# EAGLE board incubator (EAGLE 6.5.0)
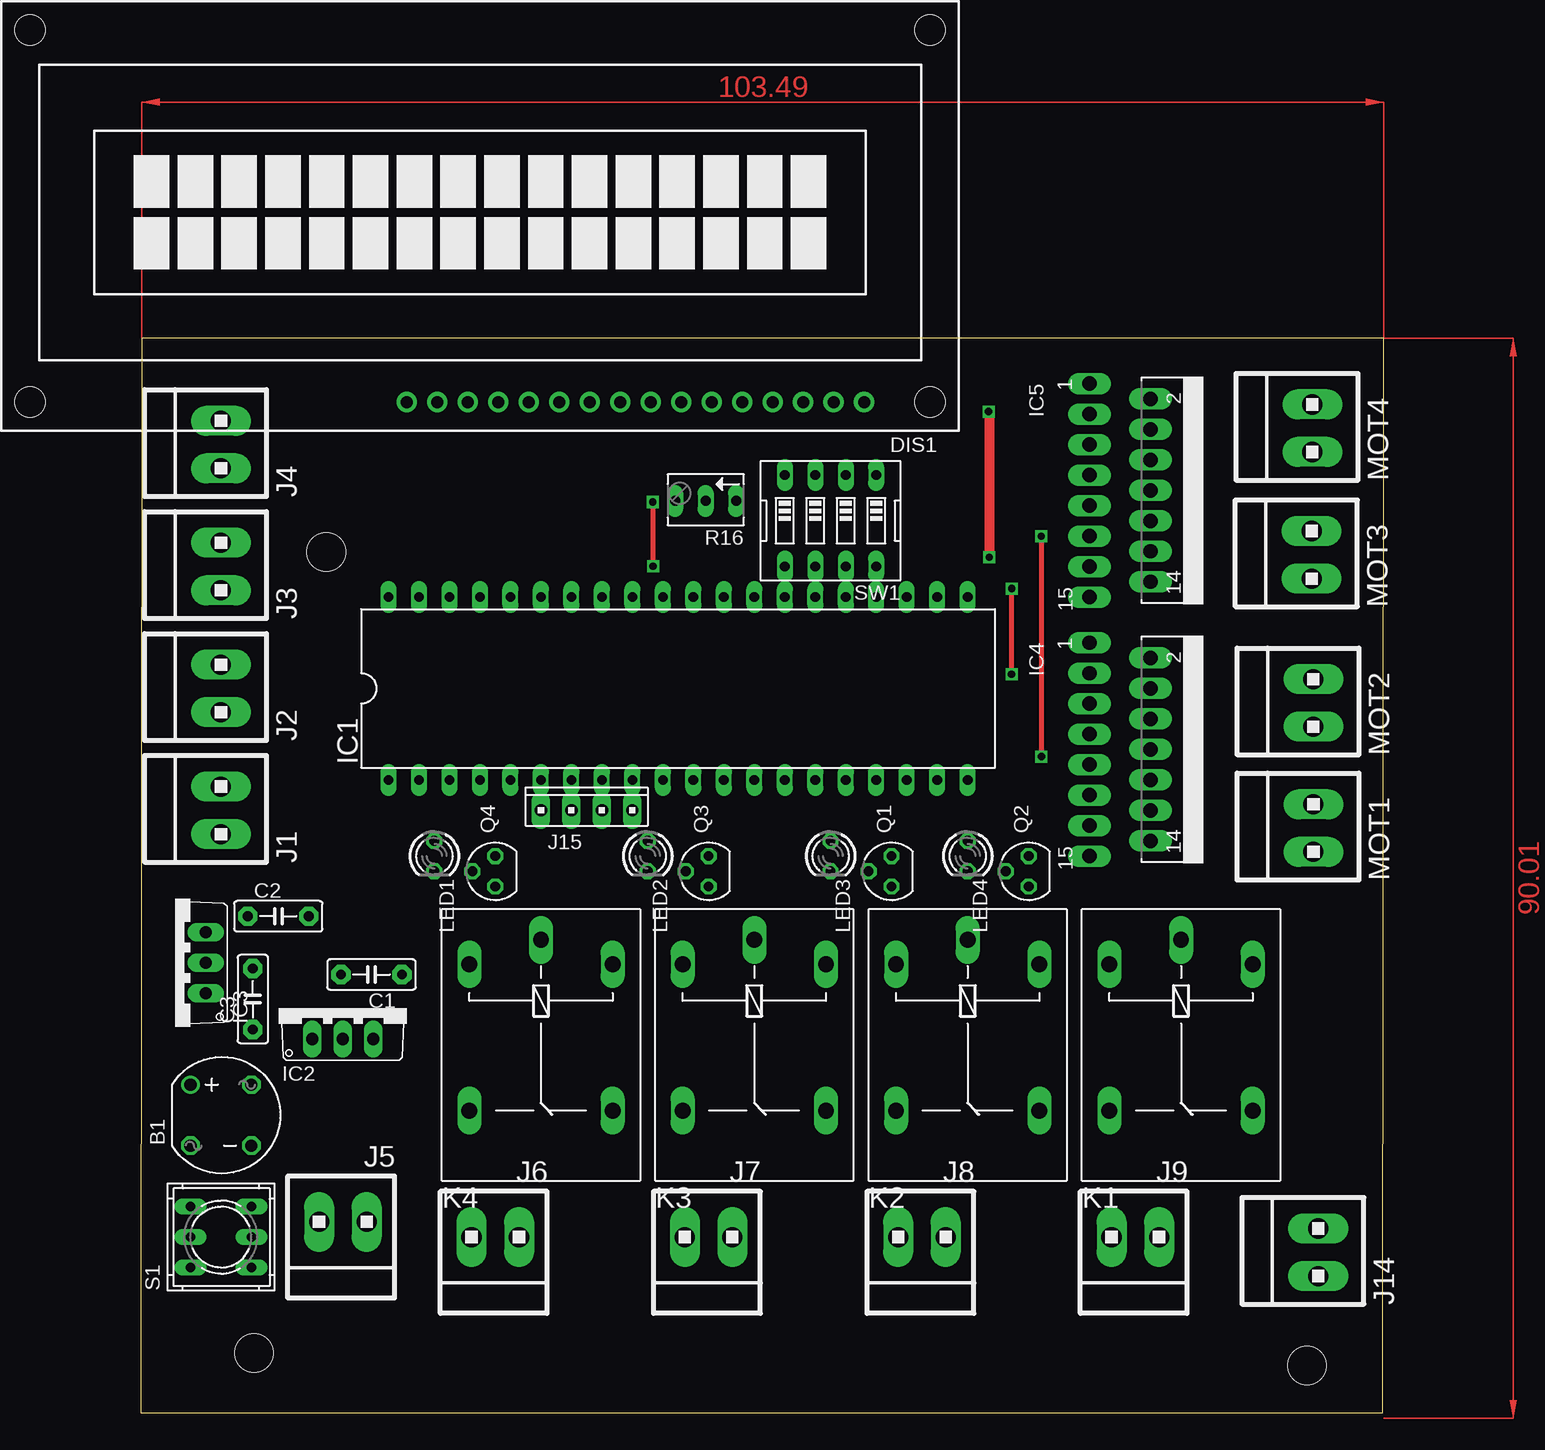
[diagram p0: board, top side]
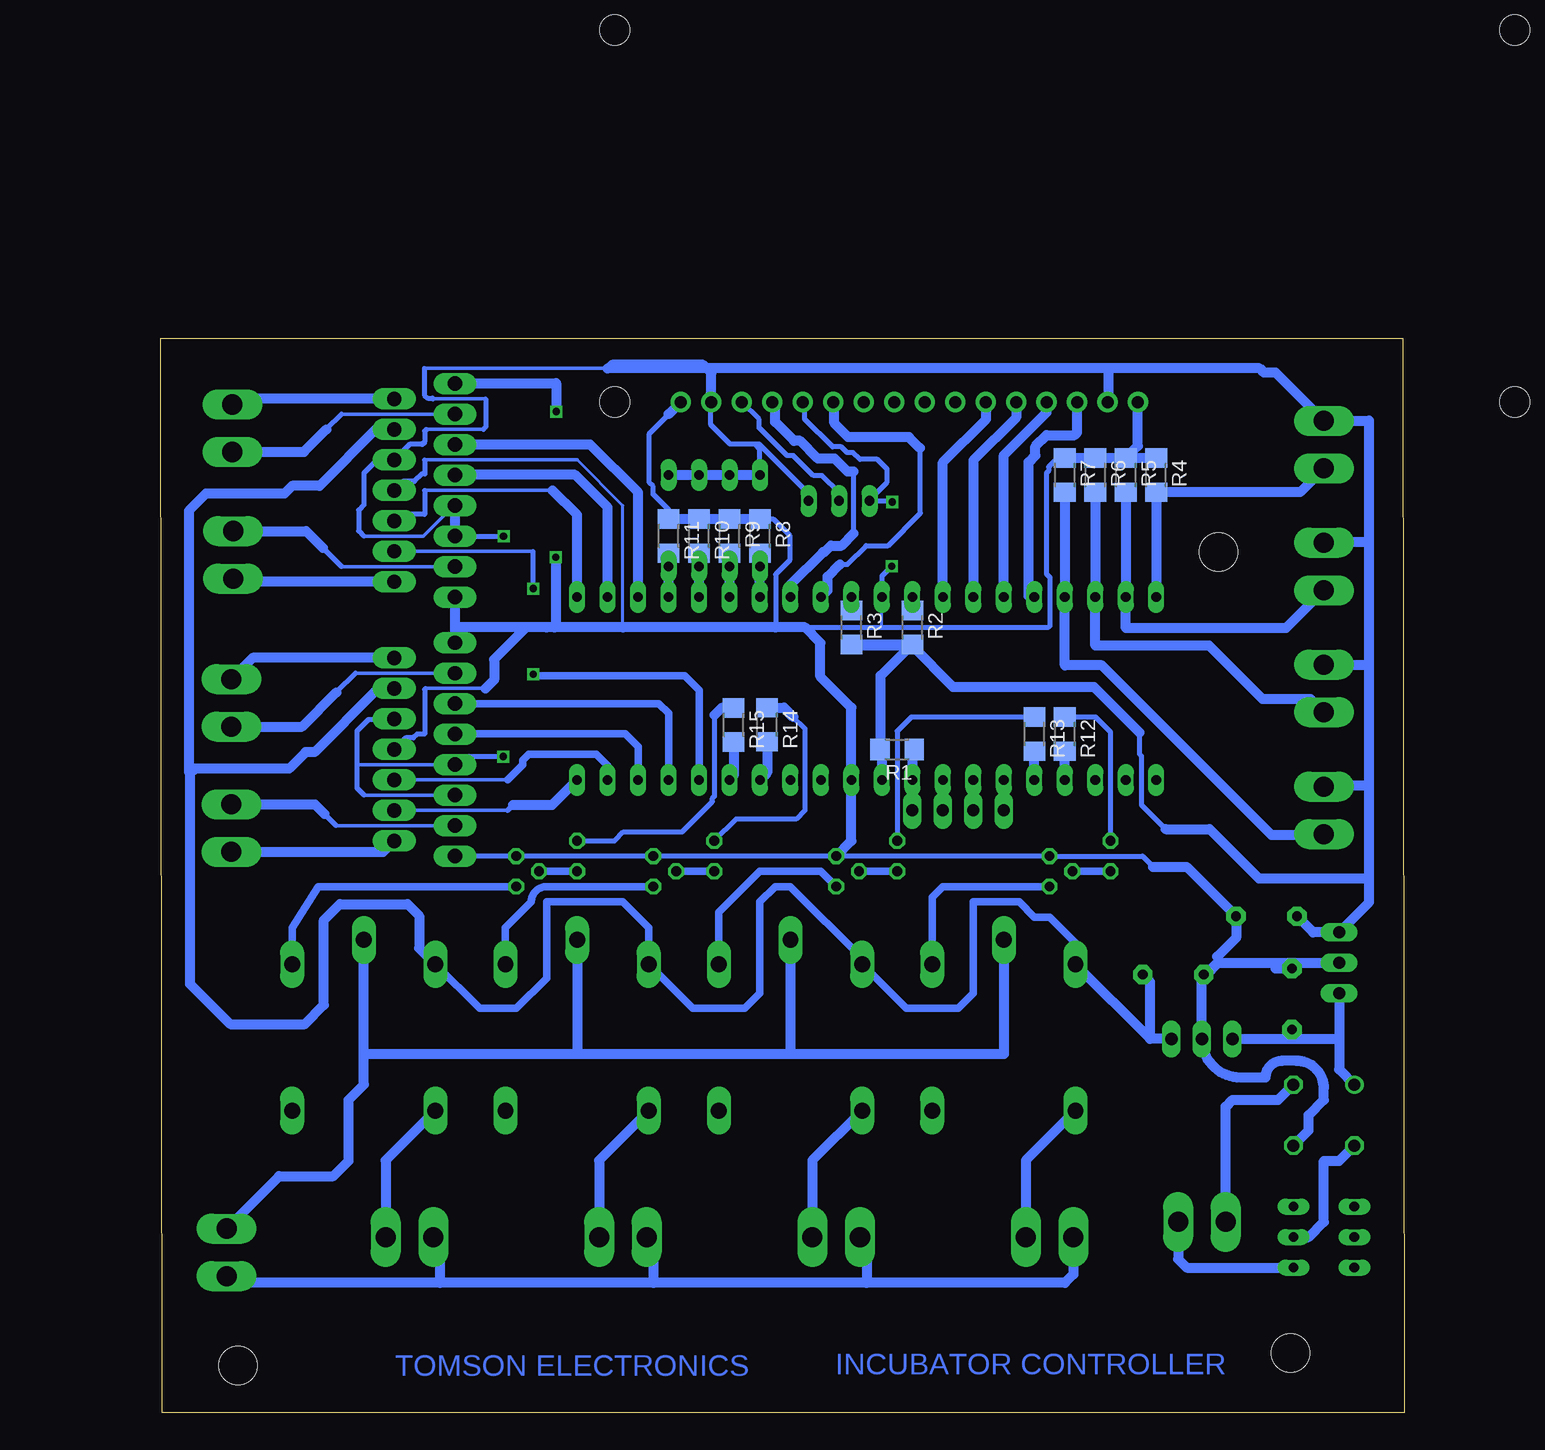
[diagram p1: board, bottom side, seen from below]

Size 103.61 x 89.56 mm. Coordinates in mm from the lower left corner, seen from the top.
Outline: 0,0 103.49,0 103.61,89.56 0.11,89.56 0,0
Copper layers (1*16): Top 0.035mm / dielectric 1.5mm / Bottom 0.035mm
Design rules "default": minimum track width 10mil, minimum drill 24mil, track to track 8mil, track to pad 8mil, pad to pad 8mil, via to via 8mil, smd to smd 8mil, copper to edge 40mil, drill to drill 8mil, minimum pad ring 10mil, minimum via ring 8mil, stop-mask expansion 4mil, vias tented up to drill 0mil, thermal gap 10mil
Holes 3.2 mm at 9.46,5 97.2,3.94 15.47,71.75

## Footprints (pad centres in the part's own frame; a part is rotated, then mirrored left to right if it is on the bottom)
RB1A = drill 1.016: + -2.54,2.54 | drill 1.016 octagon: - 2.54,-2.54; AC1 2.54,2.54; AC2 -2.54,-2.54
C5B2.5 = drill 0.813 pad 1.6 octagon: 1 -2.54,0; 2 2.54,0
TUXGR_16X2_R2 = drill 1 pad 1.676: 1 -32,15.5; 2 -29.46,15.5; 3 -26.92,15.5; 4 -24.38,15.5; 5 -21.84,15.5; 6 -19.3,15.5; 7 -16.76,15.5; 8 -14.22,15.5; 9 -11.68,15.5; 10 -9.14,15.5; 11 -6.6,15.5; 12 -4.06,15.5; 13 -1.52,15.5; 14 1.02,15.5; 15 3.56,15.5; 16 6.1,15.5 | hole 2.5: -37.5,-15.5; 37.5,-15.5; -37.5,15.5; 37.5,15.5
DIL40 = drill 0.813 long: 1 -24.13,-7.62; 2 -21.59,-7.62; 3 -19.05,-7.62; 4 -16.51,-7.62; 5 -13.97,-7.62; 6 -11.43,-7.62; 7 -8.89,-7.62; 8 -6.35,-7.62; 9 -3.81,-7.62; 10 -1.27,-7.62; 11 1.27,-7.62; 12 3.81,-7.62; 13 6.35,-7.62; 14 8.89,-7.62; 15 11.43,-7.62; 16 13.97,-7.62; 17 16.51,-7.62; 18 19.05,-7.62; 19 21.59,-7.62; 20 24.13,-7.62; 21 24.13,7.62; 22 21.59,7.62; 23 19.05,7.62; 24 16.51,7.62; 25 13.97,7.62; 26 11.43,7.62; 27 8.89,7.62; 28 6.35,7.62; 29 3.81,7.62; 30 1.27,7.62; 31 -1.27,7.62; 32 -3.81,7.62; 33 -6.35,7.62; 34 -8.89,7.62; 35 -11.43,7.62; 36 -13.97,7.62; 37 -16.51,7.62; 38 -19.05,7.62; 39 -21.59,7.62; 40 -24.13,7.62
TO220V = drill 1.016 long: 1 -2.54,-2.54; 2 0,-2.54; 3 2.54,-2.54
MULTIWATT-15 = drill 1.2 long: 1 -8.89,-7.62; 2 -7.62,-2.54; 3 -6.35,-7.62; 4 -5.08,-2.54; 5 -3.81,-7.62; 6 -2.54,-2.54; 7 -1.27,-7.62; 8 0,-2.54; 9 1.27,-7.62; 10 2.54,-2.54; 11 3.81,-7.62; 12 5.08,-2.54; 13 6.35,-7.62; 14 7.62,-2.54; 15 8.89,-7.62
1X2MTA = drill 1.676 long: 1 1.981,0; 2 -1.981,0
10X04MTA = drill 1.016 long: 1 3.81,0; 2 1.27,0; 3 -1.27,0; 4 -3.81,0
G5LE = drill 1.321 long: 1 -7.493,-5.969; 2 -7.493,5.969; O 4.699,5.969; P -9.525,0; S 4.699,-5.969
LED3MM = drill 0.813 octagon: A -1.27,0; K 1.27,0
SOT54A = drill 0.813 octagon: B 0,1.905; C -1.27,0; E 1.27,0
R1206 = smd 1.6 x 1.803: 1 -1.422,0; 2 1.422,0
B64Y = drill 0.813 long: A 2.54,0; E -2.54,0; S 0,0
9077-2 = drill 0.813 long: 1 -2.54,2.54; 2 0,2.54; 3 2.54,2.54; 4 -2.54,-2.54; 5 0,-2.54; 6 2.54,-2.54
EDG-04 = drill 0.813 long: 1 -3.81,-3.81; 2 -1.27,-3.81; 3 1.27,-3.81; 4 3.81,-3.81; 5 3.81,3.81; 6 1.27,3.81; 7 -1.27,3.81; 8 -3.81,3.81

## Placement (x,y rotation side)
B1  [RB1A]  6.69,24.8 0 top
C1  [C5B2.5]  19.24,36.52 180 top
C2  [C5B2.5]  11.47,41.38 0 top
C3  [C5B2.5]  9.35,34.48 90 top
DIS1  TUXGR_16X2_R2  [TUXGR_16X2_R2]  28.28,99.73 180 top
IC1  MEGA32-P  [DIL40]  44.79,60.36 0 top
IC2  7812TV  [TO220V]  16.85,33.69 0 top
IC3  7805TV  [TO220V]  2.88,37.5 90 top
IC4  L298  [MULTIWATT-15]  86.7,55.28 270 top
IC5  L298  [MULTIWATT-15]  86.7,76.87 270 top
J1  ntc1  [1X2MTA]  6.69,50.2 90 top
J2  ntc2  [1X2MTA]  6.69,60.36 90 top
J3  ntc3  [1X2MTA]  6.69,70.52 90 top
J4  ntc4  [1X2MTA]  6.69,80.68 90 top
J5  12 v in  [1X2MTA]  16.85,15.91 180 top
J6  lamp1  [1X2MTA]  29.55,14.64 180 top
J7  lamp2  [1X2MTA]  47.33,14.64 180 top
J8  lamp3  [1X2MTA]  65.11,14.64 180 top
J9  lamp4  [1X2MTA]  82.89,14.64 180 top
J14  220 vac  [1X2MTA]  98.13,13.37 90 top
J15  [10X04MTA]  37.17,50.2 0 top
K1  G5L  [G5LE]  86.7,29.88 270 top
K2  G5L  [G5LE]  68.92,29.88 270 top
K3  G5L  [G5LE]  51.14,29.88 270 top
K4  G5L  [G5LE]  33.36,29.88 270 top
LED1  [LED3MM]  24.47,46.39 270 top
LED2  [LED3MM]  42.25,46.39 270 top
LED3  [LED3MM]  57.49,46.39 270 top
LED4  [LED3MM]  68.92,46.39 270 top
MOT1  [1X2MTA]  97.73,48.73 90 top
MOT2  [1X2MTA]  97.73,59.16 90 top
MOT3  [1X2MTA]  97.58,71.5 90 top
MOT4  [1X2MTA]  97.64,82.05 90 top
Q1  BC547  [SOT54A]  62.57,45.12 90 top
Q2  BC547  [SOT54A]  74,45.12 90 top
Q3  BC547  [SOT54A]  47.33,45.12 90 top
Q4  BC547  [SOT54A]  29.55,45.12 90 top
R1  [R1206]  42.25,55.28 180 bottom
R2  [R1206]  40.98,65.44 270 bottom
R3  [R1206]  46.06,65.44 270 bottom
R4  [R1206]  20.66,78.14 270 bottom
R5  [R1206]  23.2,78.14 270 bottom
R6  [R1206]  25.74,78.14 270 bottom
R7  [R1206]  28.28,78.14 270 bottom
R8  [R1206]  53.68,73.06 270 bottom
R9  [R1206]  56.22,73.06 270 bottom
R10  [R1206]  58.76,73.06 270 bottom
R11  [R1206]  61.3,73.06 270 bottom
R12  [R1206]  28.28,56.55 270 bottom
R13  [R1206]  30.82,56.55 270 bottom
R14  [R1206]  53.08,57.33 270 bottom
R15  [R1206]  55.87,57.32 270 bottom
R16  [B64Y]  47.09,76 180 top
S1  9077-2  [9077-2]  6.69,14.64 90 top
SW1  [EDG-04]  57.49,74.33 180 top

## Library data of the parts
B1 = rectifier
C1-C3 = capacitor-wima
DIS1 = display-lcd; OC_FARNELL: unknown; OC_NEWARK: unknown
IC1 = atmel; MPN: ATMEGA32-16PU; OC_FARNELL: 1661729; OC_NEWARK: 51P1794
IC2 IC3 = linear
IC4 IC5 = st-microelectronics; MPN: L298N; OC_FARNELL: 1589425; OC_NEWARK: 32M1527
J1-J9 J14 J15 MOT1-MOT4 = con-amp
K1-K4 = relay; OC_FARNELL: unknown; OC_NEWARK: unknown
LED1-LED4 = led
Q1-Q4 = transistor-small-signal
R1-R15 = eagle-ltspice; SPICEMODEL: NONE; SPICEPREFIX: R
R16 = pot
S1 = switch-misc
SW1 = special

## Nets
5V: C2.1 DIS1.2 DIS1.15 IC1.10 IC3.3 IC4.6 IC4.9 IC4.11 IC5.6 IC5.9 IC5.11 J1.1 J2.1 J3.1 J4.1 R1.2 R2.2 R3.2 R16.E SW1.1 SW1.2 SW1.3 SW1.4
12V: C1.1 IC2.3 IC4.4 IC5.4 K1.1 K2.1 K3.1 K4.1
AREF: IC1.32 R2.1
AVCC: IC1.30 R3.1
D4: DIS1.11 IC1.33
D5: DIS1.12 IC1.34
D6: DIS1.13 IC1.35
D7: DIS1.14 IC1.36
ENABLE: DIS1.6 IC1.29
GND: B1.- C1.2 C2.2 C3.2 DIS1.1 DIS1.5 DIS1.16 IC1.11 IC1.31 IC2.2 IC3.2 IC4.1 IC4.8 IC4.15 IC5.1 IC5.8 IC5.15 Q1.E Q2.E Q3.E Q4.E R4.1 R5.1 R6.1 R7.1 R8.1 R9.1 R10.1 R11.1 R16.A
MISO: IC1.7 J15.3
MOSI: IC1.6 J15.4
MOT1A: IC1.20 IC4.12
MOT1B: IC1.19 IC4.10
MOT2A: IC1.18 IC4.7
MOT2B: IC1.17 IC4.5
MOT3A: IC1.16 IC5.12
MOT3B: IC1.21 IC5.10
MOT4A: IC1.22 IC5.7
MOT4B: IC1.23 IC5.5
N$1: IC4.14 MOT1.2
N$2: IC4.13 MOT1.1
N$3: IC4.3 MOT2.2
N$4: IC4.2 MOT2.1
N$5: DIS1.3 R16.S
N$7: IC5.14 MOT3.2
N$8: IC5.13 MOT3.1
N$9: IC5.3 MOT4.2
N$10: IC5.2 MOT4.1
N$11: J6.2 K4.S
N$12: J7.2 K3.S
N$13: J8.2 K2.S
N$14: J9.2 K1.S
N$16: J6.1 J7.1 J8.1 J9.1 J14.2
N$17: J14.1 K1.P K2.P K3.P K4.P
N$19: J5.2 S1.4
N$20: B1.AC1 J5.1
N$21: B1.AC2 S1.5
N$22: B1.+ C3.1 IC2.1 IC3.1
N$27: IC1.15 R15.2
N$28: IC1.14 R14.2
N$29: LED4.K Q2.B
N$30: LED3.K Q1.B
N$31: IC1.5 R13.2
N$32: IC1.4 R12.2
N$36: LED1.K Q4.B
N$37: LED2.K Q3.B
N$38: K1.2 Q2.C
N$39: K2.2 Q1.C
N$40: K3.2 Q3.C
N$41: K4.2 Q4.C
N$56: LED1.A R12.1
N$57: LED2.A R13.1
N$58: LED4.A R15.1
N$59: LED3.A R14.1
NTC1: IC1.37 J1.2 R7.2
NTC2: IC1.38 J2.2 R6.2
NTC3: IC1.39 J3.2 R5.2
NTC4: IC1.40 J4.2 R4.2
RS: DIS1.4 IC1.28
RST: IC1.9 J15.1 R1.1
SCK: IC1.8 J15.2
SW1: IC1.27 R8.2 SW1.5
SW2: IC1.26 R9.2 SW1.6
SW3: IC1.25 R10.2 SW1.7
SW4: IC1.24 R11.2 SW1.8

## Tracks (layer width: path | path; a pad name or v marks a point on that pad's centre or on a via)
5V  (via drill 0.6)
  Top 0.406: v75.05,73.05 75.05,54.71 v75.07,54.69
  Bottom 0.254: 66.38,87.03 66.11,87.23
  Bottom 0.305: 66.38,87.03 81.65,87.03 81.65,87.01 | 80.91,84.49 76.55,84.49 | 81.46,81.96 76.73,81.96 | IC5.9 79.22,75.6 | 79.22,75.6 79.22,73.05 | 79.22,75.6 81.76,73.06 86.7,73.06 | IC4.11 86.67,51.47 | IC4.9 87.21,54.01
  Bottom 0.406: 22.07,56.71 22.07,54.91 21.89,54.73 21.89,50.65 19.88,48.64 | 79.23,73.06 79.22,73.05 v75.05,73.05 | v75.07,54.69 78.41,54.69 IC4.9 | 81.62,80.86 81.79,80.69 81.86,80.69 | 81.86,80.69 82.88,80.69 IC5.6 85.59,79.41 86.69,78.31 86.69,75.66 87.13,75.22 87.13,73.49 86.7,73.06 | 86.67,51.47 87.25,52.05 87.25,53.97 | 87.25,53.97 87.25,56.83 86.3,57.78 84.2,57.78 IC4.6 | 87.21,54.01 87.25,53.97 | 81.63,87.03 81.65,87.01 81.65,84.82 81.39,84.55 80.98,84.55 80.91,84.49 | 76.55,84.49 76.55,82.14 76.73,81.96 | 81.46,81.96 81.62,81.8 81.62,80.94 81.86,80.69 | R16.E 49.63,76.59 53.75,80.72 54.09,80.72 | 54.09,80.72 56.17,80.72 57.77,82.33 57.77,84.2 DIS1.2 | SW1.4 53.68,80.31 54.09,80.72
  Bottom 0.813: 2.91,44.64 2.91,42.55 IC3.3 7.59,40.04 C2.1 | 2.91,44.64 2.91,52.3 | 2.91,52.3 2.91,62.35 | 2.91,62.35 2.91,72.6 | 2.91,72.6 2.91,82.68 6.68,82.68 J4.1 10.7,86.68 11.69,86.68 12.05,87.03 24.63,87.03 | J3.1 6.6,72.6 2.91,72.6 | J2.1 2.91,62.35 | J1.1 6.57,52.3 2.91,52.3 | IC1.10 43.52,55.13 R1.2 43.62,55.34 43.62,61.43 41.03,64.02 R2.2 R3.2 45.98,63.95 41.05,63.95 37.6,60.5 25.86,60.5 22.07,56.71 | IC5.11 IC5.9 | 57.74,86.74 DIS1.2 57.74,86.66 58.42,87.34 66.01,87.34 66.11,87.23 | 19.88,48.64 16.21,48.64 12.11,44.54 3,44.54 2.91,44.64 | 24.63,87.03 66.38,87.03 | DIS1.15 24.63,84.33 24.63,87.03 | SW1.4 SW1.3 SW1.2 SW1.1
12V
  Bottom 0.61: K4.1 27.39,39.16 29.55,41.31 30.82,41.31 32.09,42.58 35.9,42.58 35.9,34.96 37.17,33.69 41.49,33.69 K3.1 45.17,37.89 51.14,43.85 52.41,43.85 53.68,42.58 53.68,34.96 54.95,33.69 59.27,33.69 K2.1 62.95,40.43 65.11,42.58 71.46,42.58 71.46,36.23 74,33.69 77.05,33.69 K1.1 | 84.38,60.14 IC4.4
  Bottom 0.813: IC2.3 21.17,31.15 | 21.17,31.15 K4.1 | 21.17,31.15 21.17,35.91 C1.1 | 84.38,60.14 85.73,60.14 90.8,55.07 91.54,55.07 92.93,53.68 100.8,53.68 101.18,53.3 | 101.18,53.3 101.18,35.75 97.83,32.4 91.62,32.4 90.01,34 90.01,41.06 88.69,42.39 83.05,42.39 82.08,41.42 82.08,38.73 K1.1 | IC5.4 85.69,81.95 90.39,77.26 92.66,77.26 93.32,76.6 99.85,76.6 101.28,75.17 101.28,53.39 101.18,53.3
AREF
  Bottom 0.254: IC1.32 R2.1 40.98,66.71
AVCC
  Bottom 0.254: IC1.30 R3.1 46.06,66.71
D4
  Bottom 0.813: IC1.33 38.44,79.21 34.84,82.8 34.84,84.2 DIS1.11
D5
  Bottom 0.813: DIS1.12 32.34,82.92 35.89,79.37 IC1.34
D6
  Bottom 0.813: IC1.35 33.36,79.82 29.8,83.38 DIS1.13
D7
  Bottom 0.813: IC1.36 30.74,68.07 31.3,68.07 31.3,79.22 30.74,79.78 30.74,80.54 29.79,81.48 27.46,81.48 27.26,81.68 DIS1.14
ENABLE
  Bottom 0.406: 47.03,70.69 46.41,70.69 44.83,72.27 43.01,72.27 40.31,74.98 40.31,80.34 40.35,80.38
  Bottom 0.813: IC1.29 48.04,68.54 48.04,69.68 47.03,70.69 | 40.35,80.38 41.28,81.31 46.33,81.31 47.49,82.47 47.49,84.14 DIS1.6
GND  (via drill 0.6)
  Top 0.406: v42.66,75.9 42.66,70.57 v42.7,70.54
  Top 0.813: v70.66,83.44 70.71,83.44 v70.71,71.3
  Bottom 0.254: 15.58,38.02 15.58,37.5 | IC1.31 43.52,65.44 49.85,65.44 49.92,65.44 | 79.08,65.44 78.96,65.44 71.46,65.44 | 68.92,79.41 65.11,75.6 65.11,65.44 | 28.28,79.41 R7.1
  Bottom 0.305: 81.62,79.41 68.92,79.41 | 81.56,60.36 76.54,60.36
  Bottom 0.406: IC4.15 Q2.E Q1.E Q3.E Q4.E 21.8,46.39 20.91,45.5 | 81.62,79.41 81.62,78.25 81.61,78.24 81.85,78.24 82.47,77.62 83.42,77.62 IC5.8 | 81.56,60.36 81.63,60.29 81.63,56.57 81.62,56.55 82.25,56.55 82.57,56.24 83.2,56.24 IC4.8 | 28.28,79.41 29.04,79.41 29.62,78.83 29.62,78.5 29.81,78.31 29.81,69.91 29.53,69.63 29.53,65.58 29.67,65.44 49.85,65.44 | DIS1.5 49.95,84.07 49.95,82.82 47.63,80.49 46.89,80.49 46.42,80.02 45.93,80.02 45.36,79.46 43.9,79.46 43.09,78.65 43.09,77.56 44.55,76.1 R16.A 42.76,76 v42.66,75.9 | v42.7,70.54 43.52,69.72 IC1.31 | R11.1 61.3,75.26 62.58,76.54 62.58,77.19 62.91,77.52 62.91,81.61 61.3,83.21 | 54.95,74.49 52.58,74.49 51.22,73.12 51.22,71.03 52.39,69.86 52.39,65.44
  Bottom 0.813: 15.49,37.5 15.58,37.5 16.85,36.23 IC2.2 arc-90 13.63,27.94 11.56,27.94 arc90 10.17,29.33 8.97,29.33 arc90 6.69,27.05 6.69,26.07 7.96,24.8 7.96,23.53 B1.- | 15.49,37.5 10.72,37.5 | 10.72,37.5 IC3.2 | Q3.E 46.06,47.66 IC1.11 46.06,58.76 48.64,61.34 48.64,64.16 49.92,65.44 52.39,65.44 65.11,65.44 70.79,65.44 | IC4.1 79.08,65.44 IC5.15 | 61.3,83.21 DIS1.1 | R4.1 R5.1 | R5.1 R6.1 R7.1 | R5.1 22.18,80.59 DIS1.16 | R11.1 R10.1 R9.1 54.95,74.49 R8.1 | IC5.1 79.03,85.81 70.66,85.81 v70.66,83.44 | 15.58,38.02 14.01,39.59 C2.2 18.13,45.5 20.91,45.5 | C1.2 16.47,36.52 15.49,37.5 | 70.79,65.44 71.46,65.44 73.17,65.44 | 73.17,65.44 78.96,65.44 | 73.17,65.44 75.83,62.79 75.83,61.08 76.54,60.36 | C3.2 10.72,37.02 10.72,37.5 | v70.71,71.3 70.71,65.53 70.79,65.44
MISO
  Bottom 0.813: J15.3 IC1.7
MOSI
  Bottom 0.813: J15.4 IC1.6
MOT1A
  Bottom 0.305: 74.72,50.2 IC4.12
  Bottom 0.406: 74.72,50.2 74.26,50.67
  Bottom 0.813: 74.26,50.67 71,50.67 IC1.20
MOT1B
  Bottom 0.305: IC4.10 74.71,52.75
  Bottom 0.406: IC4.10
  Bottom 0.61: IC1.19 66.38,53.93 67.31,54.86 72.96,54.86 73.46,54.36 73.46,54 74.71,52.75
MOT2A
  Bottom 0.61: IC1.18 63.84,55.5 64.92,56.58 79.06,56.58 IC4.7
MOT2B
  Bottom 0.61: IC1.17 61.3,58.29 62.12,59.11 IC4.5
MOT3A  (via drill 0.6)
  Top 0.406: v72.58,61.54 v72.58,68.68 v72.58,68.69
  Bottom 0.305: IC5.12 72.6,71.79
  Bottom 0.406: 72.6,71.79 72.59,71.8 72.58,71.78 v72.58,68.69
  Bottom 0.61: IC1.16 58.76,60.21 59.96,61.41 72.45,61.41 v72.58,61.54
MOT3B
  Bottom 0.305: 81.62,76.88 70.97,76.88
  Bottom 0.406: 81.62,76.88 81.62,76.87 81.62,74.89 81.64,74.87 83.62,74.87 IC5.10
  Bottom 0.813: IC1.21 68.92,74.82 70.97,76.88
MOT4A
  Bottom 0.813: IC1.22 66.38,75.45 69.09,78.16 79.06,78.16 IC5.7
MOT4B
  Bottom 0.813: IC1.23 63.84,76.71 67.83,80.69 IC5.5
N$1
  Bottom 0.813: MOT1.2 85.08,46.75 IC4.14
N$2
  Bottom 0.305: IC4.13 89,48.93
  Bottom 0.406: 89,48.93 89.96,49.89
  Bottom 0.813: MOT1.1 90.78,50.71 89.96,49.89
N$3
  Bottom 0.305: IC4.3 87.38,61.63
  Bottom 0.406: 87.38,61.63 88.99,60.03
  Bottom 0.813: MOT2.2 91.84,57.18 88.99,60.03
N$4
  Bottom 0.813: IC4.2 95.97,62.9 MOT2.1
N$5
  Bottom 0.406: R16.S 47.09,76.67 48.52,78.1 49.24,78.1 50.89,79.76 51.43,79.76 53.75,82.08 53.75,82.79 DIS1.3
N$7
  Bottom 0.813: IC5.14 97.32,69.25 MOT3.2
N$8
  Bottom 0.305: IC5.13 88.54,70.52
  Bottom 0.406: 88.54,70.52 90.09,72.07
  Bottom 0.813: MOT3.1 91.5,73.48 90.09,72.07
N$9
  Bottom 0.305: IC5.3 88.54,83.22
  Bottom 0.406: 88.54,83.22 89.81,81.95
  Bottom 0.813: MOT4.2 91.7,80.07 89.81,81.95
N$10
  Bottom 0.813: IC5.2 97.18,84.49 MOT4.1
N$11
  Bottom 0.813: K4.S 31.53,21.05 J6.2
N$12
  Bottom 0.813: K3.S 49.31,21.05 J7.2
N$13
  Bottom 0.813: K2.S 67.09,21.05 J8.2
N$14
  Bottom 0.813: K1.S 84.87,21.05 J9.2
N$16
  Bottom 0.813: J6.1 27.57,11.55 28.28,10.83 44.79,10.83 | 44.79,10.83 62.57,10.83 | 62.57,10.83 80.35,10.83 | 80.35,10.83 97.57,10.83 J14.2 | J9.1 80.35,14.09 80.35,10.83 | J8.1 62.57,14.09 62.57,10.83 | J7.1 44.79,14.09 44.79,10.83
N$17
  Bottom 0.813: J14.1 93.76,19.72 89.24,19.72 87.97,20.99 87.97,26.07 86.7,27.34 86.7,29.88 | 86.7,29.88 K1.P | K4.P 33.36,29.88 51.14,29.88 | 51.14,29.88 68.92,29.88 | 68.92,29.88 86.7,29.88 | K3.P 51.14,29.88 | K2.P 68.92,29.88
N$19
  Bottom 0.813: J5.2 18.83,12.82 18.12,12.1 S1.4
N$20
  Bottom 0.813: J5.1 14.87,25.52 14.31,26.07 10.5,26.07 B1.AC1
N$21
  Bottom 0.813: S1.5 7.96,14.64 6.69,15.91 6.69,20.99 5.42,20.99 B1.AC2
N$22
  Bottom 0.813: IC3.1 5.42,31.15 | 5.42,31.15 5.42,28.61 B1.+ | IC2.1 9.17,31.15 | 9.17,31.15 5.42,31.15 | C3.1 9.17,31.94 9.17,31.15
N$27
  Bottom 0.813: R15.2 55.87,53.09 IC1.15
N$28
  Bottom 0.813: R14.2 53.08,53.34 IC1.14
N$29
  Bottom 0.61: LED4.K Q2.B
N$30
  Bottom 0.61: LED3.K Q1.B
N$31
  Bottom 0.813: IC1.5 R13.2
N$32
  Bottom 0.813: IC1.4 R12.2
N$36
  Bottom 0.61: LED1.K Q4.B
N$37
  Bottom 0.61: LED2.K Q3.B
N$38
  Bottom 0.61: K1.2 92.67,40.43 90.51,43.85 Q2.C
N$39
  Bottom 0.61: K2.2 74.89,40.43 72.73,42.58 arc90 71.46,43.85 Q1.C
N$40
  Bottom 0.61: K3.2 57.11,41.7 53.68,45.12 48.6,45.12 Q3.C
N$41
  Bottom 0.61: K4.2 39.33,42.97 38.44,43.85 Q4.C
N$56
  Bottom 0.406: LED1.A 24.45,47.68 24.45,56.72 25.71,57.98 R12.1
N$57
  Bottom 0.406: R13.1 41.07,57.98 42.24,56.8 LED2.A
N$58
  Bottom 0.406: LED4.A 65.79,47.66 65.05,48.4 60.17,48.4 57.65,50.93 57.65,51.21 57.48,51.38 57.48,58.14
  Bottom 0.813: R15.1 56.89,58.74 57.48,58.14
N$59
  Bottom 0.406: 50.89,57.98 49.94,57.03 49.94,50.21 50.68,49.48 55.67,49.48 LED3.A
  Bottom 0.813: R14.1 51.67,58.76 50.89,57.98
NTC1
  Bottom 0.813: J1.2 6.77,48.14 11.05,48.14 25.2,62.29 28.28,62.29 IC1.37 R7.2
NTC2
  Bottom 0.813: J2.2 7.79,59.48 11.8,59.48 16.24,63.92 25.73,63.92 25.74,63.93 IC1.38 R6.2
NTC3
  Bottom 0.813: J3.2 9.85,65.38 23.2,65.38 | 23.2,65.38 | 23.2,65.38 IC1.39 R5.2
NTC4
  Bottom 0.813: J4.2 8.67,76.72 R4.2 IC1.40
RS
  Bottom 0.406: 45.87,73.29 45.87,78.43
  Bottom 0.813: IC1.28 51.14,68.99 48.42,71.71 48.32,71.71 47.77,72.27 46.89,72.27 45.87,73.29 | 45.87,78.43 46.38,78.43 47.45,79.51 48.86,79.51 50.33,80.99 50.83,80.99 52.41,82.57 52.41,83.99 DIS1.4
RST
  Bottom 0.813: J15.1 IC1.9 40.98,55.13 R1.1
SCK
  Bottom 0.813: J15.2 IC1.8
SW1
  Bottom 0.254: SW1.5 R8.2 53.68,71.79
  Bottom 0.813: IC1.27 SW1.5
SW2
  Bottom 0.254: SW1.6 R9.2 56.22,71.79
  Bottom 0.813: IC1.26 SW1.6
SW3
  Bottom 0.254: SW1.7 R10.2 58.76,71.79
  Bottom 0.813: IC1.25 SW1.7
SW4
  Bottom 0.254: SW1.8 R11.2 61.3,71.79
  Bottom 0.813: IC1.24 SW1.8
(copper drawn outside any net)
  shapes: Top area x2

## Text on the board
Bottom: INCUBATOR CONTROLLER | TOMSON ELECTRONICS